# Altium PCB helix_4_minimal_template.PcbDoc
Units mil, origin at the board's own origin, x right, y up, seen from the top; angles counter-clockwise.
Board outline 6000 x 4000 mil, 2 copper layers (Top Layer, Bottom Layer); 3 components, 15 nets, 118 pads, 0 vias.
Unrouted connection lines stored in the file: 1.
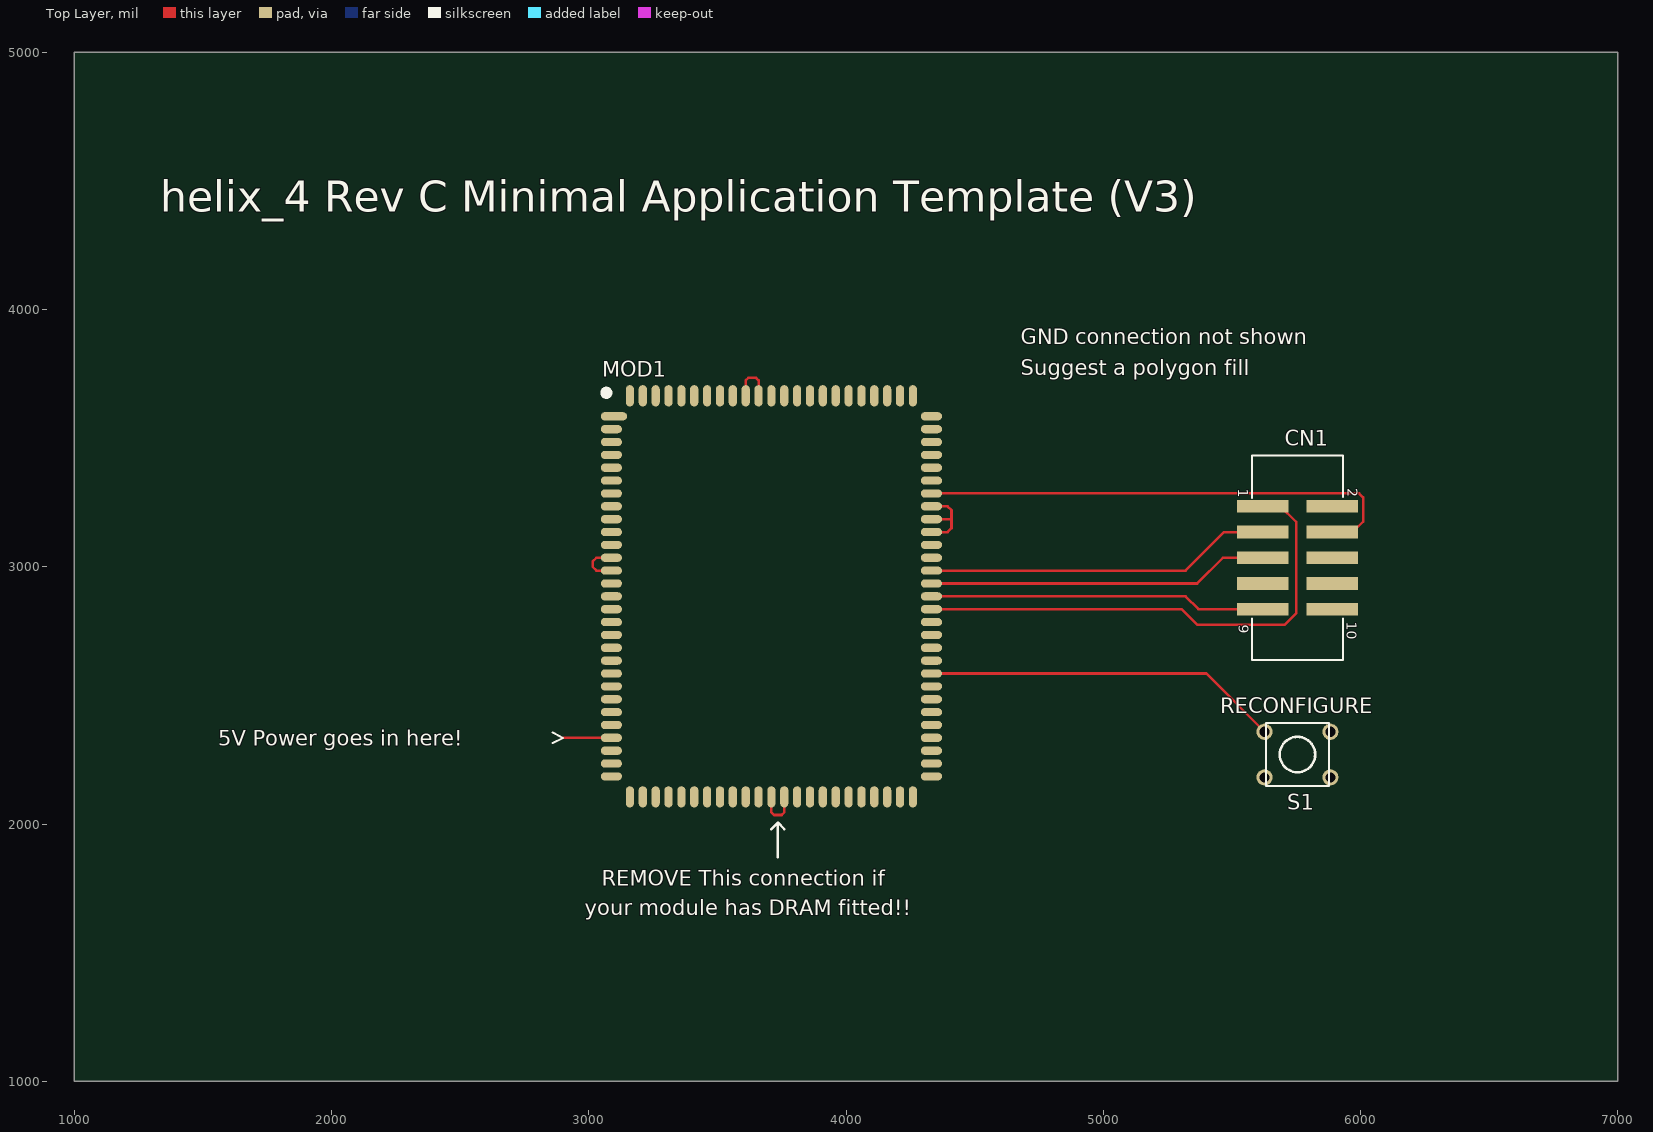
[diagram p0: Top Layer view]
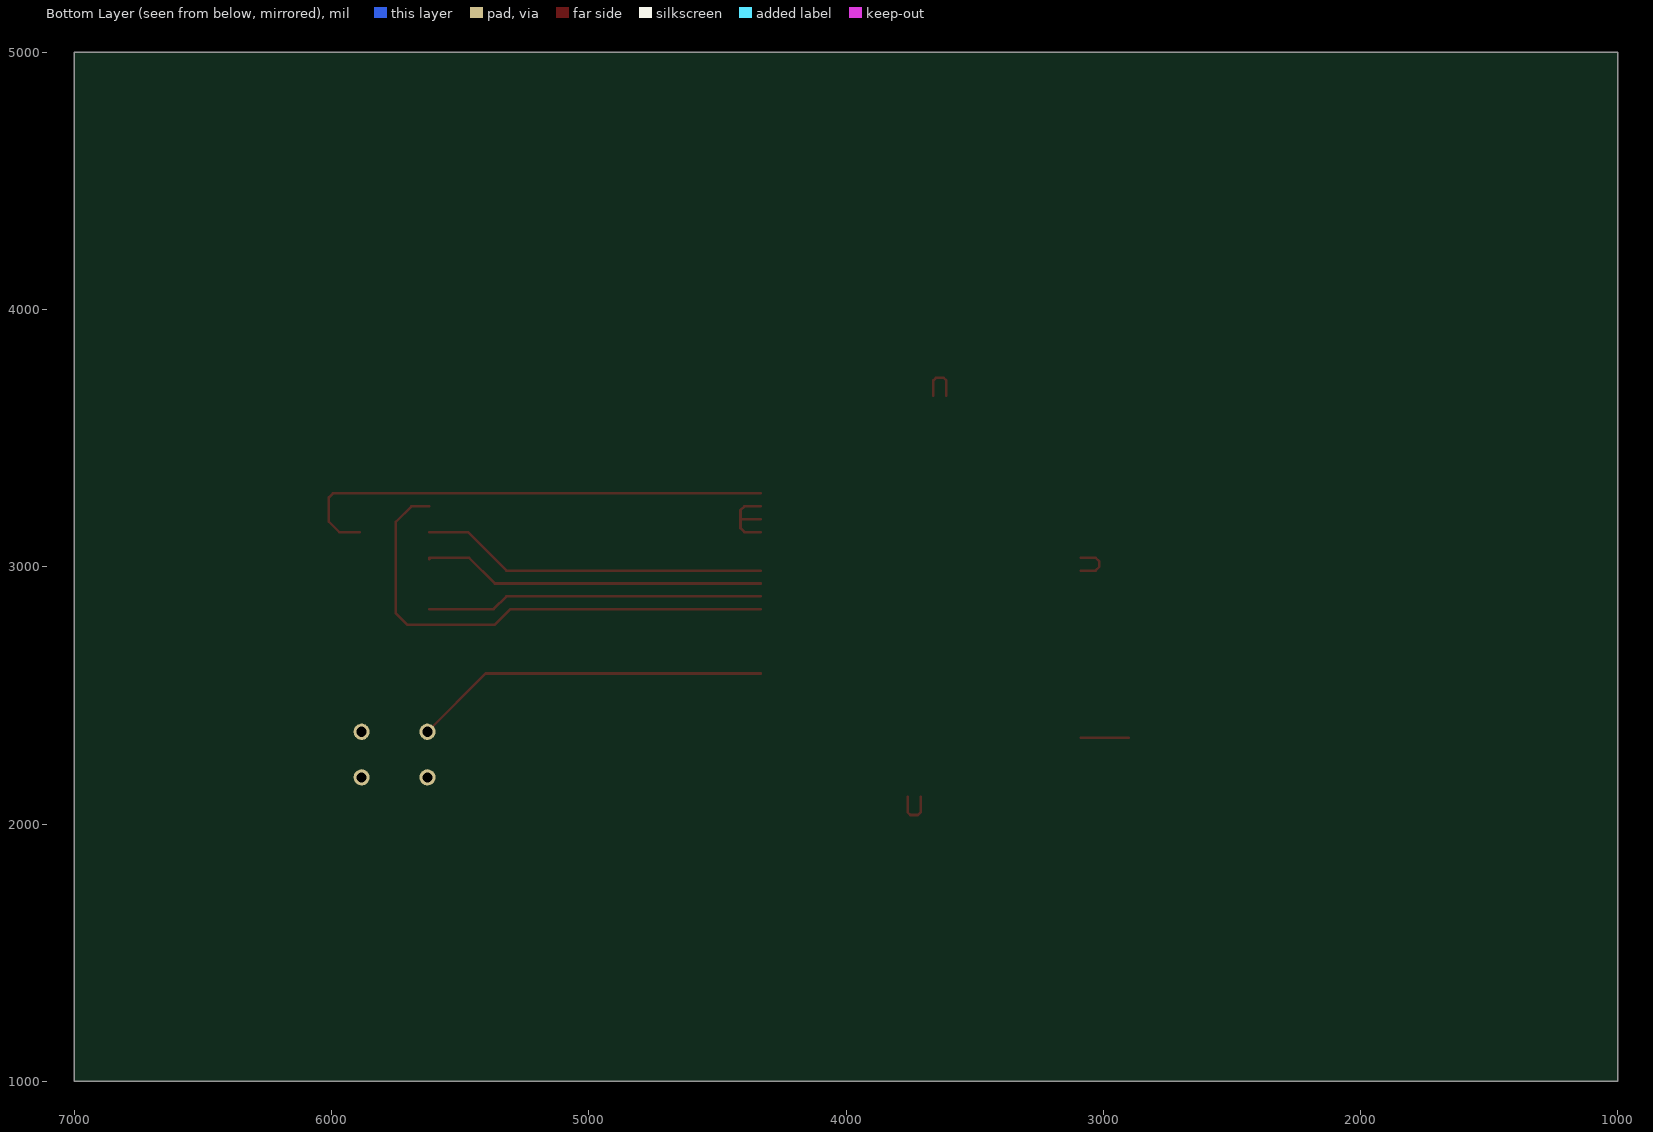
[diagram p1: Bottom Layer view, seen from below]

## Layer stack, top to bottom
Top Layer: signal copper 1.4
Dielectric: dielectric 12.6, FR-4, Dk 4.8
Bottom Layer: signal copper 1.4

## Board outline
1000,1000 7000,1000 7000,5000 1000,5000

## Design rules (kind name [scope] priority, off if disabled: settings)
Clearance [All] p1: gap=10
PolygonConnect [All] p1: connectstyle=Relief reliefconductorwidth=10 reliefentries=4 polygonreliefangle="90 Angle"
RoutingVias [All] p1: holewidth=28 width=50 viastyle="Through Hole" minholewidth=28 minwidth=50 maxholewidth=28 maxwidth=50
SilkscreenOverComponentPads [All] p1: minsilkscreentomaskgap=10
SolderMaskExpansion [All] p1: expansion=4
Width [All] p1: maxlimit=10 minlimit=10 preferedwidth=10
27 further rules are at their usual default settings.

## Components (designator, comment, footprint, x,y, rotation, side; value= is the part's Value field where it differs from the comment)
CN1 "Altera JTAG 2x5 Header" BOXHDR2X5_SMT 5755,3235 r270 top
MOD1 "helix_4" HELIX_4_LCC104_HOST 3710,2885 r0 top
S1 "SW-PB" TL1105_V 5755,2270 r90 top

## Footprints (in the part's own frame and the unit in brackets; to place one, negate y for a bottom-side part, rotate by r counter-clockwise, add the part's x,y. Pads: shape width x height; smd on the part's side, far side on the other; paste and mask are expansions set on the pad)
BOXHDR2X5_SMT [mm] "Connector; Header; 5x2 Position"
  rect 1.27x5.08 smd: 1(0,-3.43) 2(0,3.43) 3(2.54,-3.43) 4(2.54,3.43) 5(5.08,-3.43) 6(5.08,3.43) 7(7.62,-3.43) 8(7.62,3.43) 9(10.16,-3.43) 10(10.16,3.43)
  silkscreen extent -5.02,-4.5 15.18,4.5
HELIX_4_LCC104_HOST [mm] "Module socket 32x40mm"
  oval 2.6x0.813 smd: 1(-15.55,17.78)
  oval 2.1x0.813 smd: 2(-15.8,16.51) 3(-15.8,15.24) 4(-15.8,13.97) 5(-15.8,12.7) 6(-15.8,11.43) 7(-15.8,10.16) 8(-15.8,8.89) 9(-15.8,7.62) 10(-15.8,6.35) 11(-15.8,5.08) 12(-15.8,3.81) 13(-15.8,2.54) 14(-15.8,1.27) 15(-15.8,0) 16(-15.8,-1.27) 17(-15.8,-2.54) 18(-15.8,-3.81) 19(-15.8,-5.08) 20(-15.8,-6.35) 21(-15.8,-7.62) 22(-15.8,-8.89) 23(-15.8,-10.16) 24(-15.8,-11.43) 25(-15.8,-12.7) 26(-15.8,-13.97) 27(-15.8,-15.24) 28(-15.8,-16.51) 29(-15.8,-17.78) 53(15.8,-17.78) 54(15.8,-16.51) 55(15.8,-15.24) 56(15.8,-13.97) 57(15.8,-12.7) 58(15.8,-11.43) 59(15.8,-10.16) 60(15.8,-8.89) 61(15.8,-7.62) 62(15.8,-6.35) 63(15.8,-5.08) 64(15.8,-3.81) 65(15.8,-2.54) 66(15.8,-1.27) 67(15.8,0) 68(15.8,1.27) 69(15.8,2.54) 70(15.8,3.81) 71(15.8,5.08) 72(15.8,6.35) 73(15.8,7.62) 74(15.8,8.89) 75(15.8,10.16) 76(15.8,11.43) 77(15.8,12.7) 78(15.8,13.97) 79(15.8,15.24) 80(15.8,16.51) 81(15.8,17.78)
  oval 0.813x2.1 smd: 30(-13.97,-19.8) 31(-12.7,-19.8) 32(-11.43,-19.8) 33(-10.16,-19.8) 34(-8.89,-19.8) 35(-7.62,-19.8) 36(-6.35,-19.8) 37(-5.08,-19.8) 38(-3.81,-19.8) 39(-2.54,-19.8) 40(-1.27,-19.8) 41(0,-19.8) 42(1.27,-19.8) 43(2.54,-19.8) 44(3.81,-19.8) 45(5.08,-19.8) 46(6.35,-19.8) 47(7.62,-19.8) 48(8.89,-19.8) 49(10.16,-19.8) 50(11.43,-19.8) 51(12.7,-19.8) 52(13.97,-19.8) 82(13.97,19.8) 83(12.7,19.8) 84(11.43,19.8) 85(10.16,19.8) 86(8.89,19.8) 87(7.62,19.8) 88(6.35,19.8) 89(5.08,19.8) 90(3.81,19.8) 91(2.54,19.8) 92(1.27,19.8) 93(0,19.8) 94(-1.27,19.8) 95(-2.54,19.8) 96(-3.81,19.8) 97(-5.08,19.8) 98(-6.35,19.8) 99(-7.62,19.8) 100(-8.89,19.8) 101(-10.16,19.8) 102(-11.43,19.8) 103(-12.7,19.8) 104(-13.97,19.8)
  silkscreen extent -16.6,19.8 -16,20.4
TL1105_V [mm] "SPST 6X6MM SWITCH NO"
  round 1.6 hole 1: 1(-2.25,3.25) 1(-2.25,-3.25) 2(2.25,3.25) 2(2.25,-3.25)
  silkscreen extent -3.1,-3.1 3.1,3.1

## Part data
CN1: "Header, 5-Pin, Dual row"
MOD1: library part "helix_4 Rev C Module"
S1: "Switch"

## Nets (pads, with @x,y where several pads share a name; then routed paths per layer and width w, separated by ;. In a path a pad name is that pad's centre, name@x,y a point inside that pad or via, vN(x,y) a via of type N, cw(c..) or ccw(c..) an arc to the next point about the centre after c; other vN are vias at no path point)
2V5_RIGHT: CN1.4 MOD1.75 | length 1915.7
  Top Layer w10: MOD1.75 5995,3285 6010,3270 6010,3175 5970,3135 CN1.4
3V3_BOTTOM: MOD1.41 MOD1.42 | length 179.2
  Top Layer w10: MOD1.41 3710,2045 3720,2035 3750,2035 3760,2045 MOD1.42
3V3_LEFT: MOD1.12 MOD1.13 | length 178.3
  Top Layer w10: MOD1.13 3030,2985 3015,3000 3015,3020 3030,3035 MOD1.12
3V3_RIGHT: MOD1.72 MOD1.73 MOD1.74 | length 316.3
  Top Layer w10: MOD1.72 4395,3135 4410,3150 4410,3185 ; MOD1.73 4410,3185 ; MOD1.74 4395,3235 4410,3220 4410,3185
3V3_TOP: MOD1.94 MOD1.95 | length 179.2
  Top Layer w10: MOD1.95@3610,3664.06 3610,3724.53 3620,3734.53 3650,3734.53 3660,3724.53 MOD1.94@3660,3664.06
CONF_DONE: MOD1.17
GND: CN1.2 CN1.10 MOD1.3 MOD1.9 MOD1.19 MOD1.22 MOD1.25 MOD1.27 MOD1.32 MOD1.38 MOD1.47 MOD1.50 MOD1.55 MOD1.58 MOD1.63 MOD1.79 MOD1.84 MOD1.88 MOD1.91 MOD1.99 MOD1.102 S1.1
NCE: MOD1.70
NCONFIG: MOD1.61 S1.2 | length 1388.8
  Top Layer w10: MOD1.61 5400.63,2585 S1.2@5627.05,2358.58
NCSO: MOD1.51
TCK: CN1.1 MOD1.66 | length 1972
  Top Layer w10: MOD1.66 5305,2835 5365,2775 5465,2775 5706.17,2775 5750,2818.83 5750,3175 5690,3235 CN1.1
TDI_FPGA: CN1.9 MOD1.67 | length 1308.6
  Top Layer w10: MOD1.67 5320,2885 5370,2835 5470,2835 CN1.9
TDO_FPGA: CN1.3 MOD1.69 | length 1350
  Top Layer w10: MOD1.69 5320,2985 5470,3135 CN1.3
TMS: CN1.5 MOD1.68 | length 1336.4
  Top Layer w10: MOD1.68 5365,2935 5465,3035 CN1.5 ; CN1.5@5614.96,3035 CN1.5@5619.96,3030
VIN: MOD1.26 | length 188
  Top Layer w10: 2900,2335 MOD1.26
pads on no net: CN1.6 CN1.7 CN1.8 MOD1.1 MOD1.2 MOD1.4 MOD1.5 MOD1.6 MOD1.7 MOD1.8 MOD1.10 MOD1.11 MOD1.14 MOD1.15 MOD1.16 MOD1.18 MOD1.20 MOD1.21 MOD1.23 MOD1.24 MOD1.28 MOD1.29 MOD1.30 MOD1.31 MOD1.33 MOD1.34 MOD1.35 MOD1.36 MOD1.37 MOD1.39 MOD1.40 MOD1.43 MOD1.44 MOD1.45 MOD1.46 MOD1.48 MOD1.49 MOD1.52 MOD1.53 MOD1.54 MOD1.56 MOD1.57 MOD1.59 MOD1.60 MOD1.62 MOD1.64 MOD1.65 MOD1.71 MOD1.76 MOD1.77 MOD1.78 MOD1.80 MOD1.81 MOD1.82 MOD1.83 MOD1.85 MOD1.86 MOD1.87 MOD1.89 MOD1.90 MOD1.92 MOD1.93 MOD1.96 MOD1.97 MOD1.98 MOD1.100 MOD1.101 MOD1.103 MOD1.104

## Silkscreen, mask and mechanical layers (free items; w line width, h text height)
Top Overlay:
  lines w7.87: 2860,2315 2900,2335 2860,2355
  lines w10: 3710,1980 3735,2005 ; 3735,1870 3735,2005 ; 3760,1980 3735,2005
  text "helix_4 Rev C Minimal Application Template (V3)" at 1335,4380 h120
  text "GND connection not shown" at 4680,3865 h60
  text "Suggest a polygon fill" at 4680,3745 h60
  text "RECONFIGURE" at 5455,2430 h60
  text "5V Power goes in here!" at 1560,2305 h60
  text "REMOVE This connection if" at 3050,1760 h60
  text "your module has DRAM fitted!!" at 2985,1645 h60

## Text inside footprints (layer, text, board x,y; h text height)
CN1: Top Overlay "2" at 5951,3306 h39.37 r270; Top Overlay "1" at 5525,3304 h39.37 r270; Top Overlay "9" at 5526,2775 h39.37 r270; Top Overlay "10" at 5946,2787 h39.37 r270